# Altium PCB PCB_partes_proyecto.PcbDoc
Units mm, origin at the board's own origin, x right, y up, seen from the top; angles counter-clockwise.
Board outline 120 x 101.6 mm, 2 copper layers (Top Layer, Bottom Layer); 62 components, 64 nets, 259 pads, 54 vias.
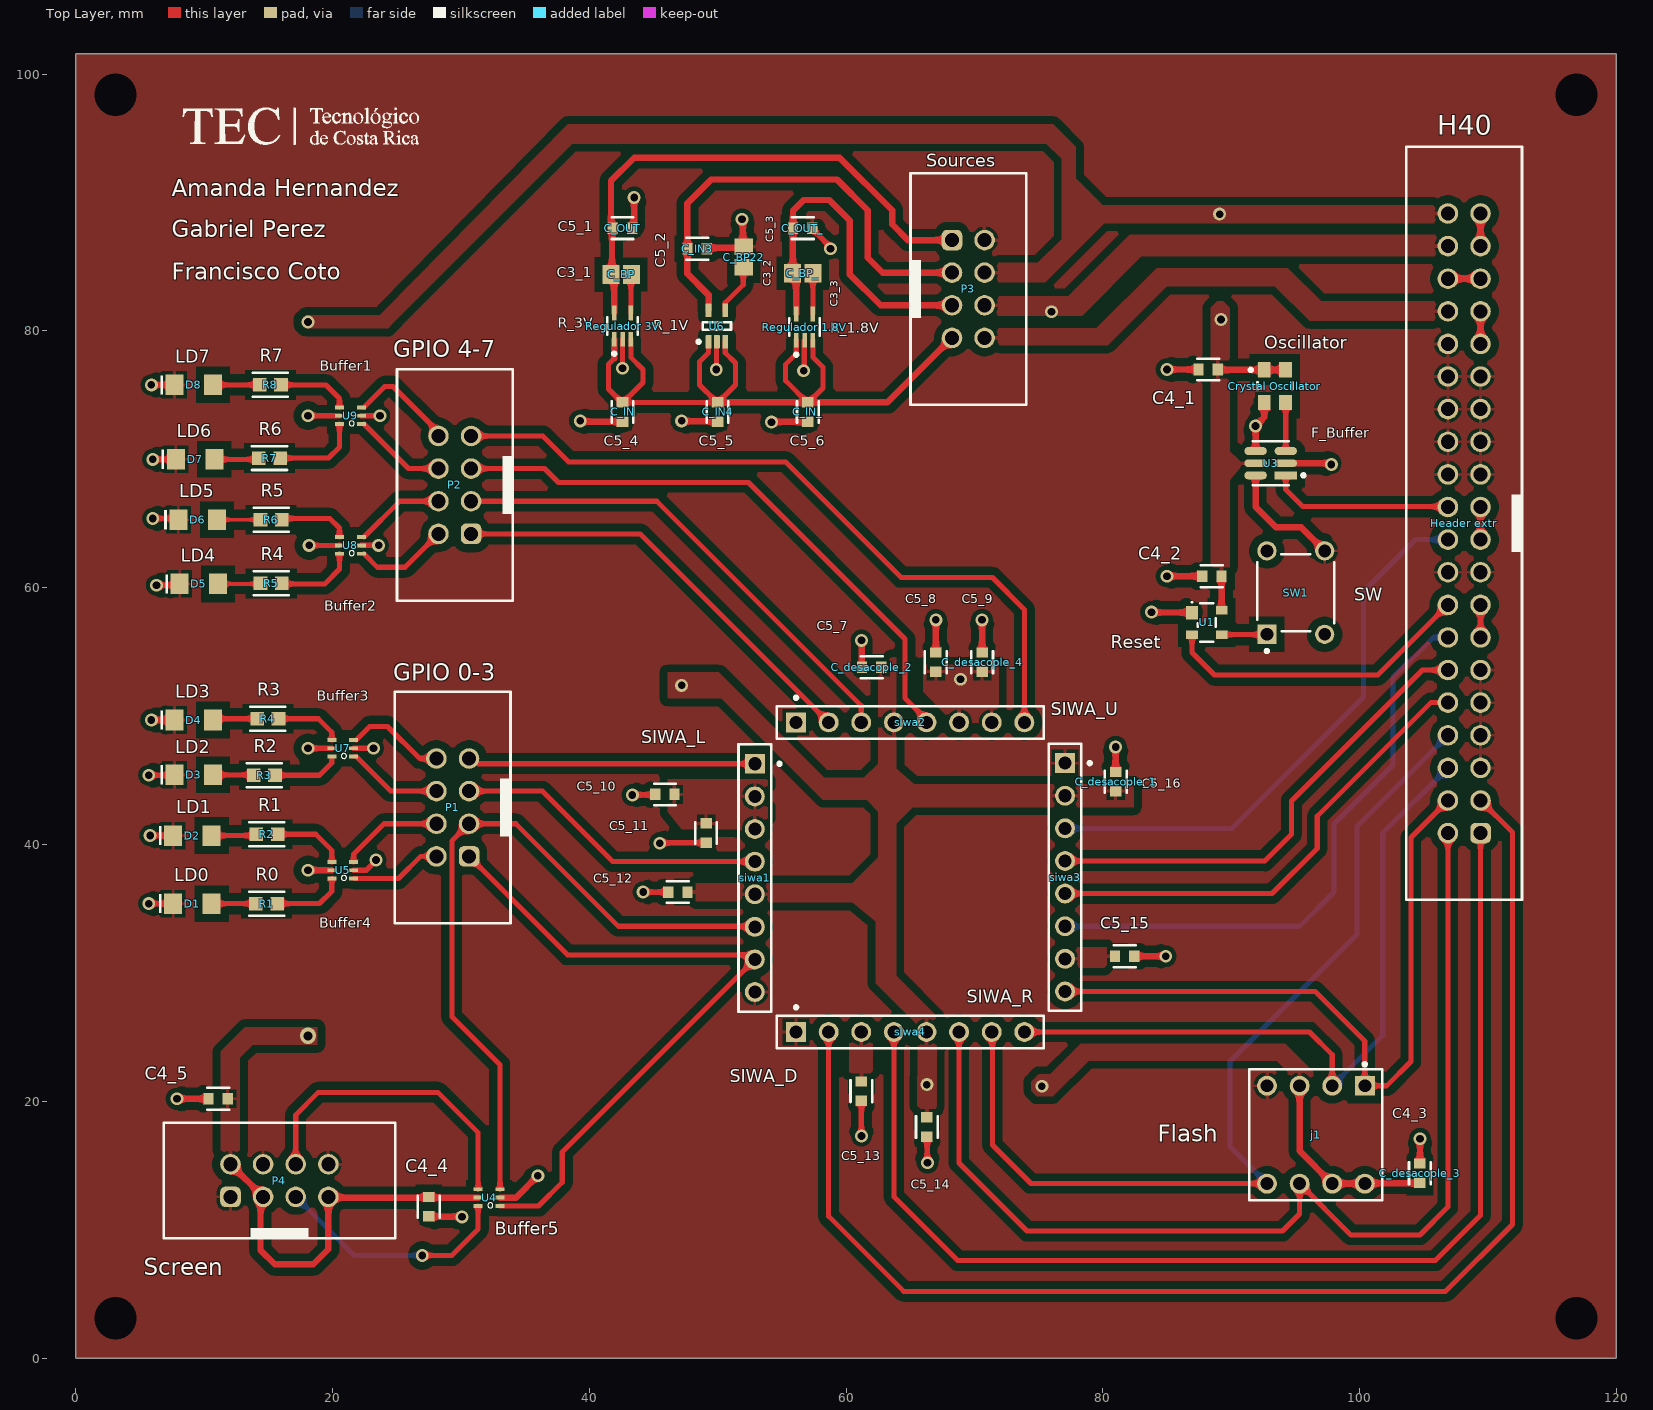
[diagram p0: Top Layer view]
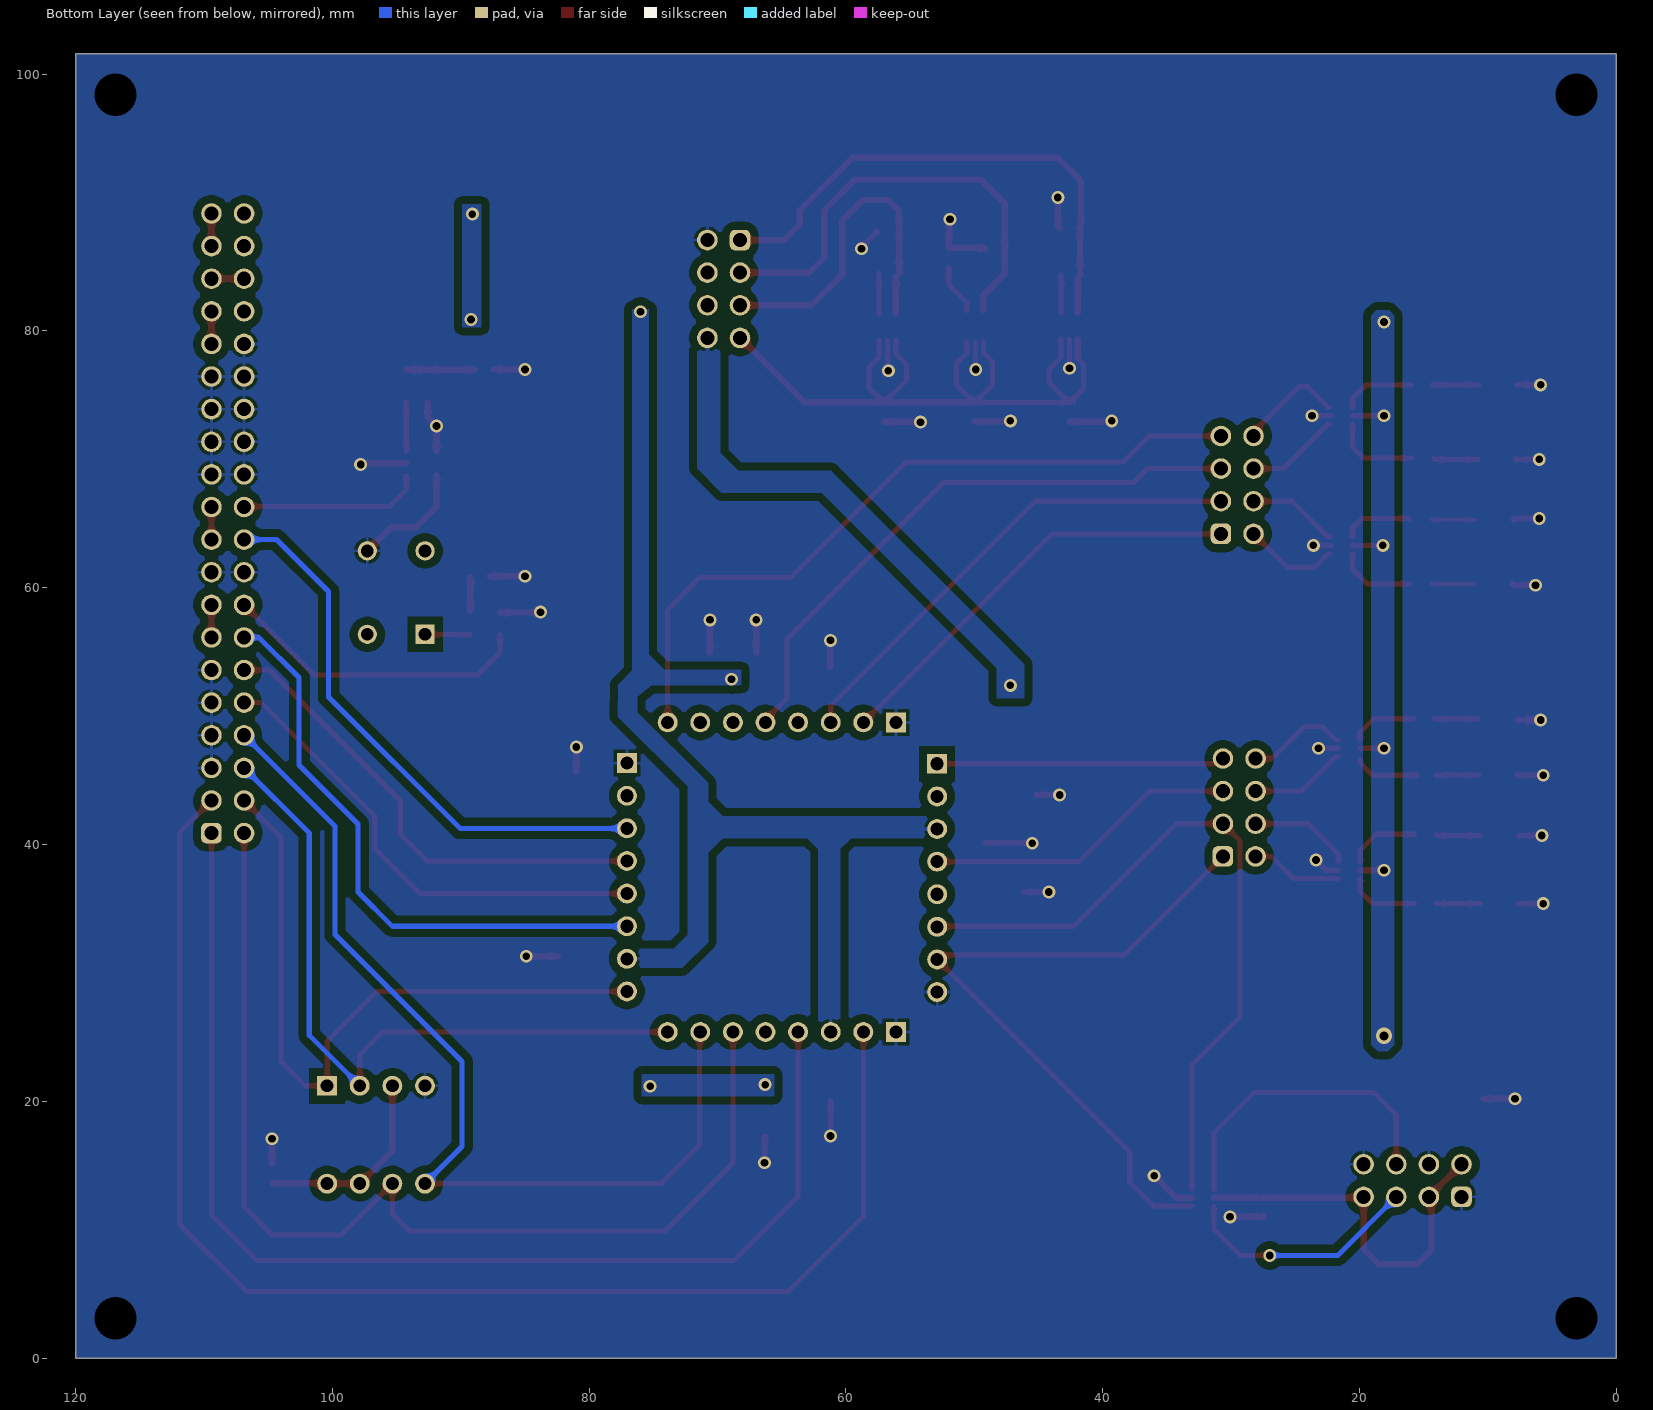
[diagram p1: Bottom Layer view, seen from below]
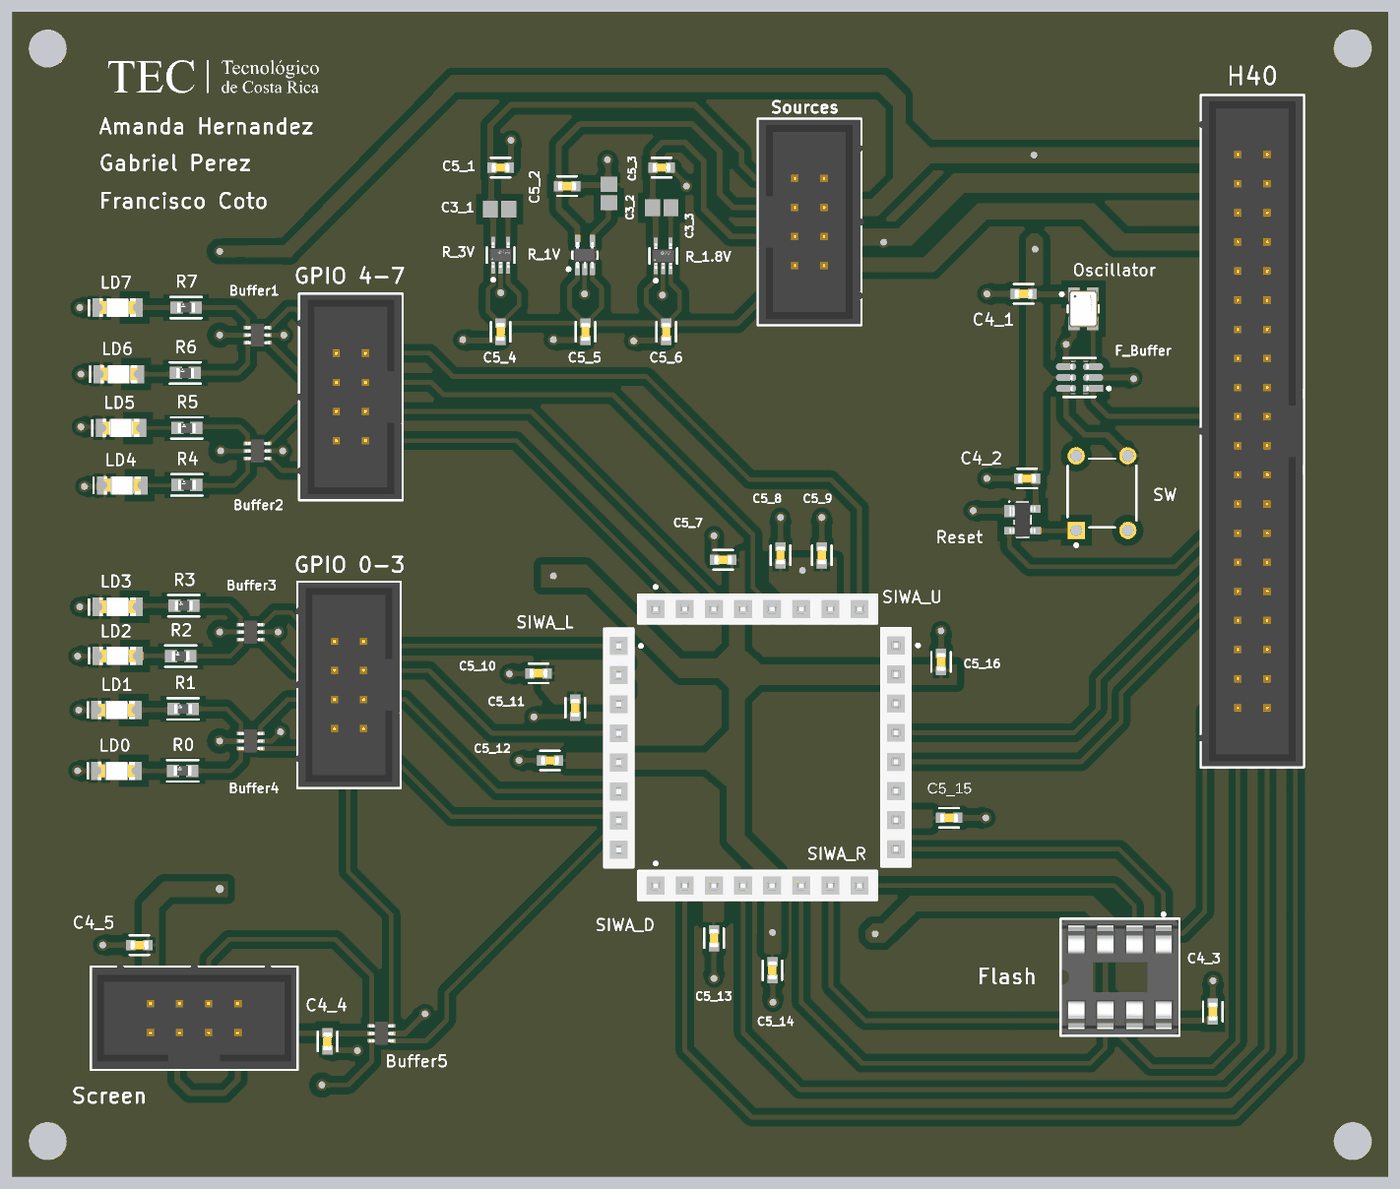
[diagram p2: 3D render of the assembled board from above, using the file's embedded part models]

## Layer stack, top to bottom
Top Solder: solder mask 0.0102, Solder Resist, Dk 3.5
Top Layer: signal copper 0.0356
Dielectric 1: dielectric 0.32, FR-4, Dk 4.8
Bottom Layer: signal copper 0.0356
Bottom Solder: solder mask 0.0102, Solder Resist, Dk 3.5

## Board outline
0,0 120,0 120,101.6 0,101.6

## Design rules (kind name [scope] priority, off if disabled: settings)
AssemblyTestPointUsage [All] p1: isadvanced=TRUE
AssemblyTestpoint [All] p1: isadvanced=TRUE testpointundercomponent=TRUE minsize=1.016 maxsize=2.54 preferedsize=1.524 minholesize=0 maxholesize=1.016 preferedholesize=0.813 testpointgrid=0.025 usegrid=TRUE gridtolerance=0 allowsidetop=TRUE allowsidebottom=TRUE
Clearance GND_Plane [(InNet('GND') AND IsRegion)] p1: isadvanced=TRUE gap=0.61 ignorepadtopadclearanceinfootprint=FALSE
Clearance Clearance_1 [OnMid vs OnMid] p2: gap=0.2 ignorepadtopadclearanceinfootprint=FALSE sourcerule=40 cellrowname=All cellrowtype=0 cellcolname=All cellcoltype=0 innerlayers=TRUE
Clearance Clearance_2 [(ExistsOnLayer('Top Layer') Or ExistsOnLayer('Bottom Layer')) vs (ExistsOnLayer('Top Layer') Or ExistsOnLayer('Bottom Layer'))] p3: gap=0.2 ignorepadtopadclearanceinfootprint=FALSE sourcerule=40 cellrowname=All cellrowtype=0 cellcolname=All cellcoltype=0 outerlayers=TRUE
Clearance [All] p4: gap=0.254 ignorepadtopadclearanceinfootprint=FALSE ismatrix=TRUE
ComponentClearance [All] p1: isadvanced=TRUE gap=0.254 collisioncheckmode=3 verticalgap=0.254 showdistances=FALSE
FabricationTestPointUsage [All] p1: isadvanced=TRUE valid=0 allowmultiple=FALSE
FabricationTestpoint [All] p1: isadvanced=TRUE side=3 testpointundercomponent=TRUE minsize=1.016 maxsize=2.54 preferedsize=1.524 minholesize=0 maxholesize=1.016 preferedholesize=0.813 testpointgrid=0.025 allowsidetop=TRUE allowsidebottom=TRUE usegrid=TRUE gridtolerance=0
FanoutControl Fanout_BGA [IsBGA] p1: isadvanced=TRUE bgadir=Out bgaviamode=Centered fanoutstyle=Auto fanoutdirection=Alternating viagrid=0.025 // Fanout_BGA (Default Rule)
FanoutControl Fanout_LCC [IsLCC] p2: isadvanced=TRUE bgadir=Out bgaviamode=Centered fanoutstyle=Auto fanoutdirection=Alternating viagrid=0.025 // Fanout_LCC (Default Rule)
FanoutControl Fanout_SOIC [IsSOIC] p3: isadvanced=TRUE bgadir=Out bgaviamode=Centered fanoutstyle=Auto fanoutdirection=Alternating viagrid=0.025 // Fanout_SOIC (Default Rule)
FanoutControl Fanout_Small [(CompPinCount < 5)] p4: isadvanced=TRUE bgadir=Out bgaviamode=Centered fanoutstyle=Auto fanoutdirection=OutThenIn viagrid=0.025 // Fanout_Small (Default Rule)
FanoutControl Fanout_Default [All] p5: isadvanced=TRUE bgadir=Out bgaviamode=Centered fanoutstyle=Auto fanoutdirection=Alternating viagrid=0.025 // Fanout_Default (Default Rule)
Height [All] p1: isadvanced=TRUE minheight=0 maxheight=25.4 prefheight=12.7
HoleSize [All] p1: isadvanced=TRUE absolutevalues=TRUE maxlimit=3.3 minlimit=0.025 maxpercent=80.000 minpercent=20.000
HoleToHoleClearance [All] p1: isadvanced=TRUE gap=0.254 allowstackedmicrovias=TRUE
LayerPairs [All] p1: isadvanced=TRUE enforce=TRUE
MinimumSolderMaskSliver [All] p1: isadvanced=TRUE minsoldermaskwidth=0.18
NetAntennae [All] p1: isadvanced=TRUE netantennaetolerance=0
PasteMaskExpansion [All] p1: isadvanced=TRUE expansion=0
PlaneClearance [All] p1: isadvanced=TRUE clearance=0.508
PlaneConnect [All] p1: isadvanced=TRUE planeconnectstyle=Relief reliefexpansion=0.508 reliefentries=4 reliefconductorwidth=0.254 reliefairgap=0.254
PolygonConnect [All] p1: connectstyle=Relief reliefconductorwidth=0.254 reliefentries=4 polygonreliefangle="90 Angle" airgapwidth=0.254
RoutingCorners [All] p1: isadvanced=TRUE cornerstyle=45-Degree minsetback=2.54 maxsetback=2.54
RoutingPriority [All] p1: isadvanced=TRUE routingpriority=0
RoutingVias [All] p1: holewidth=0.6 width=1 viastyle="Through Hole" minholewidth=0.6 minwidth=1 maxholewidth=0.6 maxwidth=1
ShortCircuit [All] p1: isadvanced=TRUE allowed=FALSE
SilkToSilkClearance [All] p1: isadvanced=TRUE silktosilkclearance=0.254
SilkToSolderMaskClearance [IsPad] p1: isadvanced=TRUE minsilkscreentomaskgap=0.19 clearancetoexposedcopper=TRUE
SolderMaskExpansion SolderMaskExpansion_Via [All] p1: isadvanced=TRUE expansion=0.102 istentingtop=TRUE useseparateexpansions=TRUE expansionbottom=0.102 istentingbottom=TRUE
SolderMaskExpansion [All] p2: isadvanced=TRUE expansion=0.102 istentingtop=FALSE
SupplyNets "Schematic Supply Nets" [InNet('GND')] p1: isadvanced=TRUE voltage=0.000
UnRoutedNet [All] p1: isadvanced=TRUE
UnpouredPolygon [All] p1: isadvanced=TRUE
Width "Schematic Width Constraint" [InNetClass('Power')] p1: maxlimit=0.6 minlimit=0.25 preferedwidth=0.5 minimp=50.000000 maximp=50.000000 favimp=50.000000
Width [All] p2: maxlimit=0.45 minlimit=0.2 preferedwidth=0.3 minimp=50.000000 maximp=50.000000 favimp=50.000000
4 further rules are at their usual default settings.

## Classes and differential pairs
net class Power: "Alimentación 1.8V" "Alimentación 1V" "Alimentación 3V" "Alimentación ext 1.8V" "Alimentación ext 1V" "Alimentación ext 3V" "Fuente 3.3V" GND "Salida de regulador de 1.8V" "Salida de regulador de 1V" "Salida de regulador de 3V"
component class partes_proyecto: C4_1 C4_2 C4_4 C4_5 C5_8 C5_10 C5_11 C5_12 C5_14 C5_15 C_BP22 C_desacople_1 C_desacople_2 C_desacople_3 C_desacople_4 C_IN C_IN3 C_IN4 "Crystal Oscillator" D1 D2 D3 D4 D5 D6 D7 D8 "Fanout Buffer" "Header extr" j1 P1 P2 P3 P4 R1 R2 R3 R4 R5 R6 R7 R8 R101 "Regulador 1.8V" "Regulador 3V" siwa1 siwa2 siwa4 SW1 U1 U3 U4 U5 U6 U7 U8 U9

## Components (designator, comment, footprint, x,y, rotation, side; value= is the part's Value field where it differs from the comment)
C4_1 "CC0603KRX7R7BB104" FP-CC0603-DA-MFG 88.2,77 r180 top value="100 nF" (schematic designator C_desacople_12)
C4_2 "CC0603KRX7R7BB104" FP-CC0603-DA-MFG 88.5,60.9 r0 top value="100 nF" (schematic designator C_desacople_13)
C4_4 "CC0603KRX7R7BB104" FP-CC0603-DA-MFG 27.5,11.8 r270 top value="100 nF" (schematic designator C_desacople_14)
C4_5 "CC0603KRX7R7BB104" FP-CC0603-DA-MFG 11.1,20.2 r0 top value="100 nF" (schematic designator C_desacople_15)
C5_8 "CC0603KRX7R7BB104" FP-CC0603-DA-MFG 67,54.2 r90 top value="100 nF" (schematic designator C_desacople_5)
C5_10 "CC0603KRX7R7BB104" FP-CC0603-DA-MFG 45.9,43.9 r0 top value="100 nF" (schematic designator C_desacople_10)
C5_11 "CC0603KRX7R7BB104" FP-CC0603-DA-MFG 49.1,40.9 r90 top value="100 nF" (schematic designator C_desacople_11)
C5_12 "CC0603KRX7R7BB104" FP-CC0603-DA-MFG 46.9,36.3 r180 top value="100 nF" (schematic designator C_desacople_9)
C5_13 "CC0603KRX7R7BB104" FP-CC0603-DA-MFG 61.2,20.8 r270 top value="100 nF" (schematic designator C_desacople_8)
C5_14 "CC0603KRX7R7BB104" FP-CC0603-DA-MFG 66.3,18 r270 top value="100 nF" (schematic designator C_desacople_7)
C5_15 "CC0603KRX7R7BB104" FP-CC0603-DA-MFG 81.7,31.3 r0 top value="100 nF" (schematic designator C_desacople_6)
C_BP "C3_1" CAPC2013X100X50NL20T25 42.5,84.4 r180 top
C_BP22 "C3_2" CAPC2013X100X50NL20T25 52.036,85.757 r270 top
C_BP_ "C3_3" CAPC2013X100X50NL20T25 56.632,84.501 r180 top
C_desacople_1 "C5_16" FP-CC0603-DA-MFG 81,44.9 r270 top value="100 nF"
C_desacople_2 "C5_7" FP-CC0603-DA-MFG 62,53.8 r180 top value="100 nF"
C_desacople_3 "C4_3" FP-CC0603-DA-MFG 104.7,14.4 r270 top value="100 nF"
C_desacople_4 "C5_9" FP-CC0603-DA-MFG 70.6,54.2 r90 top value="100 nF"
C_IN "C5_4" FP-CC0603-DA-MFG 42.594,73.689 r270 top value="100 nF"
C_IN3 "C5_2" FP-CC0603-DA-MFG 48.4,86.4 r0 top value="100 nF"
C_IN4 "C5_5" FP-CC0603-DA-MFG 49.995,73.689 r270 top value="100 nF"
C_IN_ "C5_6" FP-CC0603-DA-MFG 57.034,73.689 r270 top value="100 nF"
C_OUT "C5_1" FP-CC0603-DA-MFG 42.594,88.012 r0 top value="100 nF"
C_OUT_ "C5_3" FP-CC0603-DA-MFG 56.625,88.012 r0 top value="100 nF"
"Crystal Oscillator" "Oscillator" FP-ASE3-MFG 93.4,75.7 r270 top
D1 "LD0" WL-SMCW_1206_150120xx75000 9.1,35.4 r0 top locked
D2 "LD1" WL-SMCW_1206_150120xx75000 9.1,40.7 r0 top
D3 "LD2" WL-SMCW_1206_150120xx75000 9.208,45.426 r0 top
D4 "LD3" WL-SMCW_1206_150120xx75000 9.2,49.7 r0 top
D5 "LD4" WL-SMCW_1206_150120xx75000 9.6,60.3 r0 top
D6 "LD5" WL-SMCW_1206_150120xx75000 9.5,65.3 r0 top
D7 "LD6" WL-SMCW_1206_150120xx75000 9.3,70 r0 top
D8 "LD7" WL-SMCW_1206_150120xx75000 9.2,75.8 r0 top
"Header extr" "H40" 61204021621 108.151,65.02 r90 top
j1 "Flash" FP-1-2199298-2-MFG 96.6,17.4 r180 top
P1 "GPIO 0-3" 61200821621 29.37,42.89 r90 top
P2 "GPIO 4-7" 61200821621 29.53,68.01 r90 top
P3 "Sources" 61200821621 69.525,83.27 r270 top
P4 "Screen" 61200821621 15.872,13.83 r0 top
R1 "R0" FP-MCT0603-IPC_A 14.871,35.4 r180 top
R2 "R1" FP-MCT0603-IPC_A 14.9,40.8 r180 top
R3 "R2" FP-MCT0603-IPC_A 14.7,45.4 r180 top
R4 "R3" FP-MCT0603-IPC_A 14.971,49.8 r180 top
R5 "R4" FP-MCT0603-IPC_A 15.233,60.339 r180 top
R6 "R5" FP-MCT0603-IPC_A 15.229,65.3 r180 top
R7 "R6" FP-MCT0603-IPC_A 15.1,70.1 r180 top
R8 "R7" FP-MCT0603-IPC_A 15.171,75.8 r180 top
"Regulador 1.8V" "R_1.8V" FP-X5-1-MFG 56.771,80.303 r90 top
"Regulador 3V" "R_3V" FP-X5-1-MFG 42.594,80.381 r90 top
siwa1 "SIWA_L" SLIN-PPPC081LFBN-RC_V#1 52.9,37.4 r270 top
siwa2 "SIWA_U" SLIN-PPPC081LFBN-RC_V#1 65,49.515 r0 top
siwa3 "SIWA_R" SLIN-PPPC081LFBN-RC_V#2 77.065,37.45 r270 top
siwa4 "SIWA_D" SLIN-PPPC081LFBN-RC_V#1 65,25.4 r0 top
SW1 "SW" OMRON-B3F-1000-4_V 95.033,59.624 r90 top
U1 "Reset" APX812-29UG7 88.1,57.3 r0 top
U3 "F_Buffer" FP-SOT23-6LD-PL-1-IPC_A 93.075,69.7 r180 top
U4 "Buffer5" SOT363_INFINEON 32.2,12.5 r90 top
U5 "Buffer4" SOT363_INFINEON 20.8,38 r90 top
U6 "R_1V" DCK0005A_M 49.945,80.381 r90 top
U7 "Buffer3" SOT363_INFINEON 20.8,47.5 r90 top
U8 "Buffer2" SOT363_INFINEON 21.4,63.3 r90 top
U9 "Buffer1" SOT363_INFINEON 21.4,73.4 r90 top

## Footprints (in the part's own frame and the unit in brackets; to place one, negate y for a bottom-side part, rotate by r counter-clockwise, add the part's x,y. Pads: shape width x height; smd on the part's side, far side on the other; paste and mask are expansions set on the pad)
61200821621 [mm] "8 pins, straight, gold plating"
  rrect50% 1.6x1.6 hole 1.1 mask+0.01: 1(-3.81,-1.27)
  round 1.6 hole 1.1 mask+0.01: 2(-3.81,1.27) 3(-1.27,-1.27) 4(-1.27,1.27) 5(1.27,-1.27) 6(1.27,1.27) 7(3.81,-1.27) 8(3.81,1.27)
  silkscreen extent -9.01,-4.5 9.01,4.5, body extent -8.91,-4.42 8.91,4.75, height 9.13
61204021621 [mm] "40 pins, straight, gold plating"
  rrect50% 1.6x1.6 hole 1.1 mask+0.01: 1(-24.13,-1.27)
  round 1.6 hole 1.1 mask+0.01: 2(-24.13,1.27) 3(-21.59,-1.27) 4(-21.59,1.27) 5(-19.05,-1.27) 6(-19.05,1.27) 7(-16.51,-1.27) 8(-16.51,1.27) 9(-13.97,-1.27) 10(-13.97,1.27) 11(-11.43,-1.27) 12(-11.43,1.27) 13(-8.89,-1.27) 14(-8.89,1.27) 15(-6.35,-1.27) 16(-6.35,1.27) 17(-3.81,-1.27) 18(-3.81,1.27) 19(-1.27,-1.27) 20(-1.27,1.27) 21(1.27,-1.27) 22(1.27,1.27) 23(3.81,-1.27) 24(3.81,1.27) 25(6.35,-1.27) 26(6.35,1.27) 27(8.89,-1.27) 28(8.89,1.27) 29(11.43,-1.27) 30(11.43,1.27) 31(13.97,-1.27) 32(13.97,1.27) 33(16.51,-1.27) 34(16.51,1.27) 35(19.05,-1.27) 36(19.05,1.27) 37(21.59,-1.27) 38(21.59,1.27) 39(24.13,-1.27) 40(24.13,1.27)
  silkscreen extent -29.33,-4.5 29.33,4.5, body extent -29.23,-4.42 29.23,4.75, height 9.13
APX812-29UG7 [mm] "SOT143, 4-Leads, Body 2.90x2.38mm, Pitch 1.90mm, IPC Medium Density"
  rect 0.9x1.05 smd mask+0.01: 1(-1.15,0.75)
  rect 0.9x0.65 smd mask+0.01: 2(-1.15,-0.95) 3(1.15,-0.95) 4(1.15,0.95)
  silkscreen extent -1.2,-1.5 0.7,1.62, body extent -1.18,-1.5 1.18,1.5, height 1.1
CAPC2013X100X50NL20T25 [mm] "Chip Capacitor, 2-Leads, Body 2.00x1.25mm, IPC Medium Density"
  rect 1.3x1.45 smd mask+0.01: 1(-0.8,0) 2(0.8,0)
  body extent -1.1,-0.72 1.1,0.72, height 1
DCK0005A_M [mm] "SOT23, 5-Leads, Body 2.15x1.4mm, Pitch 0.65mm, IPC Low Density"
  rrect22% 1.05x0.45 smd mask+0.01: 1(-1.225,0.65) 2(-1.225,0) 3(-1.225,-0.65) 4(1.225,-0.65) 5(1.225,0.65)
  silkscreen extent -1.35,-1.1 0.3,1.55, body extent -1.14,-1 1.14,1, height 0.94
FP-1-2199298-2-MFG [mm]
  rect 1.55x1.55 hole 1 paste-2539.97 mask+0.01: 1(-3.81,-3.81)
  round 1.55 hole 1 paste-2539.97 mask+0.01: 2(-1.27,-3.81) 3(1.27,-3.81) 4(3.81,-3.81) 5(3.81,3.81) 6(1.27,3.81) 7(-1.27,3.81) 8(-3.81,3.81)
  silkscreen extent -5.18,-5.61 5.18,5.1, body extent -5.28,-5.2 5.28,5.2, height 0.25
FP-ASE3-MFG [mm]
  rect 1.2x1 smd paste+0 mask+0: 1(-1.27,-0.825) 2(1.27,-0.825) 3(1.27,0.825) 4(-1.27,0.825)
  silkscreen extent -1.39,-2 0.3,1.35, body extent -1.97,-1.45 1.97,1.45, height 0.25
FP-CC0603-DA-MFG [mm]
  rect 0.8x0.9 smd paste+0 mask+0: 1(-0.75,0) 2(0.75,0)
  silkscreen extent -0.85,-0.85 0.85,0.85, body extent -1.35,-0.75 1.35,0.75, height 0.25
FP-MCT0603-IPC_A [mm]
  rect 1.064x1.062 smd paste+0 mask+0: 1(-0.829,0) 2(0.829,0)
  silkscreen extent -1.36,-0.93 1.36,0.93, body extent -1.86,-1.03 1.86,1.03, height 0.25
FP-SOT23-6LD-PL-1-IPC_A [mm]
  rect 1.755x0.616 smd paste+0 mask+0: 1(-1.175,0.95)
  rrect100% 1.755x0.616 smd paste+0 mask+0: 2(-1.175,0) 3(-1.175,-0.95) 4(1.175,-0.95) 5(1.175,0) 6(1.175,0.95)
  silkscreen extent -2.68,-1.7 1.4,1.7, body extent -2.55,-1.95 2.55,1.95, height 0.25
FP-X5-1-MFG [mm]
  rect 1.15x0.35 smd paste+0 mask+0: 1(-1.025,0.65) 2(-1.025,0) 3(-1.025,-0.65) 4(1.025,-0.65) 5(1.025,0.65)
  silkscreen extent -2.27,-1.2 0.67,1.2, body extent -1.7,-1.2 1.7,1.2, height 0.25
OMRON-B3F-1000-4_V [mm] "TH, 4-Leads, Body 6x6mm"
  rect 1.5x1.5 hole 1 paste-2539.97 mask+0.01: 1(-3.25,2.25)
  round 1.5 hole 1 paste-2539.97 mask+0.01: 2(3.25,2.25) 3(-3.25,-2.25) 4(3.25,-2.25)
  silkscreen extent -4.67,-3 3,3, body extent -3,-3 3,3, height 4.5
SLIN-PPPC081LFBN-RC_V#1 [mm] "THD, 8-Leads, Body 20.82x2.54mm, Pitch 2.54mm"
  rect 1.55x1.55 hole 1.02 mask+0.01: 1(-8.89,0)
  round 1.55 hole 1.02 mask+0.01: 2(-6.35,0) 3(-3.81,0) 4(-1.27,0) 5(1.27,0) 6(3.81,0) 7(6.35,0) 8(8.89,0)
  silkscreen extent -10.41,-1.27 10.41,2.05, body extent -10.41,-1.27 10.41,1.27, height 8.5
SLIN-PPPC081LFBN-RC_V#2 [mm] "THD, 8-Leads, Body 20.82x2.54mm, Pitch 2.54mm"
  rect 1.55x1.55 hole 1.02 mask+0.01: 1(-8.89,0)
  round 1.55 hole 1.02 mask+0.01: 2(-6.35,0) 3(-3.81,0) 4(-1.27,0) 5(1.27,0) 6(3.81,0) 8(8.89,0)
  round 1.55 hole 1.02 mask+0.1: 7(6.35,0)
  silkscreen extent -10.41,-1.27 10.41,2.05, body extent -10.41,-1.27 10.41,1.27, height 8.5
SOT363_INFINEON [mm]
  rect 0.3x0.7 smd mask+0.01: 1(-0.65,-0.85) 2(0,-0.85) 3(0.65,-0.85) 4(0.65,0.85) 5(0,0.85) 6(-0.65,0.85)
  silkscreen extent -0.8,-0.3 -0.4,0.1, body extent -1,-1.05 1,1.05, height 1.1
WL-SMCW_1206_150120xx75000 [mm] "SMD Mono-color Chip LED, body 3.2x1.6mm"
  rect 1.4x1.6 smd mask+0.01: 1(-1.5,0) 2(1.5,0)
  silkscreen extent -2.6,-0.75 -2.4,0.75, body extent -1.6,-0.8 1.6,0.8, height 0.68

## Part data
C4_1 C4_2 C4_4 C4_5 C5_8 C5_10 C5_11 C5_12 C5_13 C5_14 C5_15: library part CMP-2000-05002-2, "CAP CER 0.1UF 16V X7R 0603", Capacitance="100 nF", Manufacturer=YAGEO, Package=CC0603-DA, Temperature="-55°C to +125°C", Temperature Characteristic=X7R, Temperature Coefficient=15%, Temperature Range High=+125°C, Temperature Range Low=-55°C, Tolerance=0.1, Voltage="16 V", Automotive=No, Category=Cap, ComponentLink2Description=Datasheet, ComponentLink2URL=http://www.yageo.com/documents/recent/UPY-GPHC_X7R_6.3V-to-50V_18.pdf, Device Class L1="Passive Components", Device Class L2=Capacitors, Device Class L3="Ceramic Capacitors", Digikey Description="CAP CER 0.1UF 16V X7R 0603", Footprint Url=http://www.yageo.com/exep/pages/download/literatures/UPY-C_GEN_24.pdf, Height=0.9mm, Lead Free=Yes, Manufacturer Part Number=CC0603KRX7R7BB104, Material=Ceramic, Mouser Description="Multilayer Ceramic Capacitor, CC Series, 0.1 - F, - 10%, X7R, 16 V, 0603 [1608 Metric]", Octopart=https://octopart.com/cc0603krx7r7bb104-yageo-192941, RoHS=TRUE, Voltage Rating="16 V"
C_BP C_BP22 C_BP_: library part CMP-2007-03708-1, Manufacturer=Kemet, Part Number=C0805F103K5RACTU
C_desacople_1 C_desacople_2 C_desacople_3 C_desacople_4 C_IN C_IN3 C_IN4 C_IN_ C_OUT C_OUT_: library part CMP-2000-05002-2, "CAP CER 0.1UF 16V X7R 0603", Capacitance="100 nF", Manufacturer=YAGEO, Manufacturer Part Number=CC0603KRX7R7BB104, Package=CC0603-DA, Temperature="-55°C to +125°C", Temperature Characteristic=X7R, Temperature Coefficient=15%, Temperature Range High=+125°C, Temperature Range Low=-55°C, Tolerance=0.1, Voltage="16 V", Automotive=No, Category=Cap, ComponentLink2Description=Datasheet, ComponentLink2URL=http://www.yageo.com/documents/recent/UPY-GPHC_X7R_6.3V-to-50V_18.pdf, Device Class L1="Passive Components", Device Class L2=Capacitors, Device Class L3="Ceramic Capacitors", Digikey Description="CAP CER 0.1UF 16V X7R 0603", Footprint Url=http://www.yageo.com/exep/pages/download/literatures/UPY-C_GEN_24.pdf, Height=0.9mm, Lead Free=Yes, Material=Ceramic, Mouser Description="Multilayer Ceramic Capacitor, CC Series, 0.1 - F, - 10%, X7R, 16 V, 0603 [1608 Metric]", Octopart=https://octopart.com/cc0603krx7r7bb104-yageo-192941, RoHS=TRUE, Voltage Rating="16 V"
"Crystal Oscillator": library part CMP-27762-010045-1, "XTAL OSC XO 20.0000MHZ CMOS SMD", Case/Package=SMD/SMT, Frequency=20MHz, Frequency Stability=30ppm, Load Capacitance=15pF, Max Operating Temperature=70°C, Max Supply Current=4mA, Max Supply Voltage=1.89V, Min Operating Temperature=-10°C, Min Supply Voltage=1.71V, Operating Supply Voltage=1.8V, Package Quantity=1000, Depth=2.5mm, Height=0.049inch, Lead Free="Lead Free", Length=3.2mm, Mount="Surface Mount", Number of Pins=4, Packaging="Tape and Reel", Radiation Hardening=No, Series=ASE3, Termination=SMD/SMT, Width=0.098inch
D1 D2 D3 D4 D5 D6 D7 D8: library part CMP-1426-00015-3, "WL-SMCW SMT Mono-Color Chip LED Waterclear", Case Code (Imperial)=1206, Case Code (Metric)=3216, Color=Blue, Forward Current=100mA, Forward Voltage=3.2V, Manufacturer Package Identifier=LED_1206, Max Operating Temperature=85°C, Max Reverse Voltage (DC)=5V, Min Operating Temperature=-40°C, Test Current=20mA, Case/Package=1206, Dominant Wavelength=470nm, Height=680µm, Length=3.2mm, Lens Style="Clear, Rectangular", Luminous Intensity=145mcd, Mount="Surface Mount", Packaging="Tape and Reel", Peak Wavelength=465nm, REACH SVHC=Unknown, RoHS=Compliant, Viewing Angle=140°, Wavelength=470nm, Width=1.6mm
"Header extr": library part CMP-1502-00015-3, Color=Black, Contact Resistance=20mΩ, Current Rating=3A, Insulation Resistance=1GΩ, Max Operating Temperature=105°C, Min Operating Temperature=-40°C, Operating Supply Voltage=250V, Connector Type="Male Pin", Contact Material=Copper, Contact Plating=Gold, Gender=Male, Height=9.25mm, Insulation Material=PBT, Lead Pitch=2.54mm, Length=58.46mm, Mount="Through Hole", NexarPartId=25903616, Number of Contacts=40, Number of Pins=40, Number of Positions=40, Number of Rows=2, Orientation=Vertical, Pitch=2.54mm, REACH SVHC=Unknown, RoHS=Compliant, Row Spacing=2.54mm, Termination=Solder, Voltage Rating=250V
j1: library part CMP-03370-000009-1, "CONN IC DIP SOCKET 8POS TIN", Color=Black, Contact Current Rating=1A, Contact Resistance=20mR, Flammability Rating="UL94 V-0", Insulation Resistance=1GR, Max Operating Temperature=105°C, Min Operating Temperature=-40°C, Package Quantity=60, Connector Type=Pin, Contact Finish - Mating=TIN, Contact Material=Bronze, Contact Plating=Tin, Contact Post Length=3inch, ELV=Compliant, Housing Material=PBT, Lead Free="Lead Free", Lead Pitch=2.54mm, Length=0.4inch, Mating Alignment="Yes (With)", Mount="Through Hole", Number of Contacts=8, Number of Positions=8, Number of Rows=2, Orientation=Straight, Packaging=Rail/Tube, Pitch=2.54mm, Radiation Hardening=No, RoHS Compliant=Yes, Row Spacing=0.3inch, Series="Diplomate DL", Termination="Through Hole"
P1 P2 P3 P4: library part CMP-1502-00006-2, Color=Black, Contact Resistance=20mΩ, Current Rating=3A, Insulation Resistance=1GΩ, Max Operating Temperature=105°C, Min Operating Temperature=-40°C, Operating Supply Voltage=250V, Connector Type="Male Pin", Contact Material=Copper, Contact Plating=Gold, Gender=Male, Insulation Material=PBT, Lead Pitch=2.54mm, Length=17.82mm, Mount="Through Hole", NexarPartId=32855460, Number of Contacts=8, Number of Pins=8, Number of Positions=8, Number of Rows=2, Orientation=Vertical, Pitch=2.54mm, REACH SVHC=Unknown, RoHS=Compliant, Row Spacing=2.54mm, Termination=Solder
R1 R2 R3 R4 R5 R6 R7 R8: library part CMP-02407-011165-1, "RES SMD 100 OHM 1% 1/8W 0603", Case Code (Imperial)=0603, Case Code (Metric)=1608, Max Operating Temperature=155°C, Max Power Dissipation=125mW, Min Operating Temperature=-55°C, Package Quantity=1000, Resistance=20kR, Resistor Type="Thin Film", Temperature Coefficient=25ppm/°C, Tolerance=0.1%, Voltage Rating=75V, Case/Package=0603, Construction=Rectangular, Depth=0.85mm, Features="Automotive AEC-Q200", Height=0.022inch, Length=1.55mm, Military Standard=Not, Number of Terminations=2, Packaging="Tape and Reel", Power Rating=125mW, Series="MCT 0603 - Precision", Termination=SMD/SMT, Weight=6.7E-05oz, Width=0.033inch
"Regulador 1.8V": library part CMP-0246-00401-2, "IC REG LINEAR 1.8V 120MA SC70-5", Case/Package=SC, Input Bias Current=40uA, Max Input Voltage=6V, Max Operating Temperature=85°C, Max Output Current=120mA, Max Power Dissipation=247mW, Min Current Limit=130mA, Min Input Voltage=2V, Min Operating Temperature=-40°C, Nominal Output Voltage=1.8V, Package Quantity=2500, Power Supply Rejection Ratio (PSRR)=54dB, Quiescent Current=90uA, Reference Voltage=1.225V, Accuracy=2%, Lead Free="Lead Free", Mount="Surface Mount", Number of Outputs=1, Number of Pins=5, Number of Regulators=1, Output Configuration=Positive, Output Current=120mA, Output Type=Fixed, Output Voltage=1.8V, Packaging="Tape and Reel", Polarity=Positive, RoHS Compliant=Yes, Series=-
"Regulador 3V": library part CMP-0246-00520-2, "IC REG LINEAR 3V 120MA SC70-5", Case/Package=SC, Dropout Voltage=120mV, Input Bias Current=40uA, Max Input Voltage=6V, Max Operating Temperature=85°C, Max Output Current=120mA, Max Power Dissipation=247mW, Min Current Limit=130mA, Min Input Voltage=2V, Min Operating Temperature=-40°C, Nominal Output Voltage=3V, Package Quantity=2500, Power Supply Rejection Ratio (PSRR)=54dB, Quiescent Current=90uA, Reference Voltage=1.225V, Accuracy=2%, Lead Free="Lead Free", Mount="Surface Mount", Number of Outputs=1, Number of Pins=5, Number of Regulators=1, Output Configuration=Positive, Output Current=120mA, Output Type=Fixed, Output Voltage=3V, Packaging="Tape and Reel", Polarity=Positive, Radiation Hardening=No, RoHS Compliant=Yes, Series=-
siwa1 siwa2 siwa3 siwa4: library part CMP-1770-00002-1, "Female Header, Pitch 2.54 mm, 1 x 8 Position, Height 8.5 mm, Tail Length 3.2 mm, -40 to 105 degC, RoHS, Bulk", Case\Package=TO-252-3, Input Capacitance="350 pF", Max Operating Temperature="150 degC", Max Power Dissipation="2.5 W", Min Operating Temperature="-55 degC", Package Quantity=2500, ComponentLink1Description=Datasheet, ComponentLink1URL=http://sullinscorp.com/catalogs/101_PAGE114-115_.100_FEMALE_HDR.pdf, DatasheetVersion=Jan-15, Elements=1, Height="2.39 mm", Length="6.73 mm", Mount="Surface Mount", PackageDescription="Female Header, Pitch 2.54 mm, 1 x 8 Position, Height 8.5 mm, Tail Length 3.2 mm", PackageReference=PPPC081LFBN-RC, Packaging="Tape and Reel", Pins=3, Radiation Hardening=No, Rds On Max="115 mohm", REACH SVHC="No SVHC", RoHSCompliant=true, Typical Rise Time="90 ns", Width="6.22 mm"
SW1: library part CMP-1677-00002-1, "Tactile Switch, SPST-NO, 0.05 A, 5 to 24 V, -25 to 70 degC, 4-Pin THD, RoHS, Bulk", Capacitance="-45 f", Current Rating="1.5 A", Max Operating Temperature="70 degC", Min Operating Temperature="-40 degC", Package Quantity=1080, Voltage Rating="150 V", ComponentLink1Description="Manufacturer URL", ComponentLink1URL=http://www.omron.com/, ComponentLink2Description=Datasheet, ComponentLink2URL=http://www.omron.com/ecb/products/pdf/en-b3f.pdf, Contact Material=Brass, Contact Plating=Gold, DatasheetVersion=Jan-15, Gender=Female, Height="14.99 mm", Lead Pitch="1.27 mm", Length="18.34 mm", Mount="Through Hole", PackageDescription="4-Pin Through Hole Device, Body 6 x 6 mm", PackageReference=B3F-1000, Packaging=Tray, Pins=8, Radiation Hardening=No, RoHSCompliant=true, Shielding=Shielded, Width="25.4 mm"
U1: library part APX812-29UG7, "4-Pin Microprocessor Supervisor With Manual Reset. SOT143."
U3: library part CMP-06262-000018-1, "IC CLK BUFFER 1:3 150MHZ 6SOT23", Case/Package=SOT-23-6, Max Frequency=150MHz, Max Operating Temperature=85°C, Min Operating Temperature=-40°C, Package Quantity=3000, Input=LVCMOS, Lead Free="Lead Free", Mount="Surface Mount", Number of Circuits=1, Packaging="Cut Tape", RoHS Compliant=Yes, Series=-
U4 U5 U7 U8 U9: library part 74LVC2G17GW,125
U6: library part CMP-0394-00843-2, "Single Output High PSRR LDO, 150 mA, Fixed 1 V Output, 2.5 to 6.5 V Input, with Low IQ, 5-pin SC70 (DCK), -40 to 85 degC, Green (RoHS & no Sb/Br)", Manufacturer="Texas Instruments", PartNumber=TPS71710DCKT, Accuracy(%)=3, Code_JEDEC=MO-203, ComponentLink1Description="Manufacturer URL", ComponentLink1URL=http://www.ti.com/, ComponentLink2Description=Datasheet, ComponentLink2URL=http://www.ti.com/general/docs/lit/getliterature.tsp?genericPartNumber=TPS71710&fileType=pdf, ComponentLink3Description="Package Specification", ComponentLink3URL=http://www.ti.com/litv/pdf/mpds025f, DatasheetVersion=SBVS068G, Eco-Plan="Green (RoHS & no Sb/Br)", Fixed Output Options(V)=1, Iout(Max)(A)=0.15, Iq(Typ)(mA)=0.05, Mounting Technology="Surface Mount", PackageDescription="5-Pin Plastic Small-Outline, Body 2 x 1.25 mm, Pitch 0.65 mm", PackageReference=DCK0005A, PackageVersion=4093553-3/G, SubFamily="Single Channel LDO", Vdo(Typ)(mV)=170, Vin(Max)(V)=6.5, Vin(Min)(V)=2.5, Vout Adj(Max)(V)=1, Vout Adj(Min)(V)=1

## Free pads (board coordinates)
  round 3 hole 3.3 mask+0.102: 3(3.1,98.4) 4(3.1,3.1) 5(116.9,98.4) 6(116.9,3.1)

## Via types
v1: diameter 1, hole 0.6, Top Layer to Bottom Layer, tented both sides, 53 vias
v2: diameter 1.27, hole 0.711, Top Layer to Bottom Layer, tented both sides, 1 vias

## Nets (pads, with @x,y where several pads share a name; then routed paths per layer and width w, separated by ;. In a path a pad name is that pad's centre, name@x,y a point inside that pad or via, vN(x,y) a via of type N, cw(c..) or ccw(c..) an arc to the next point about the centre after c; other vN are vias at no path point)
"Alimentación 1.8V": "Header extr.34" C5_12.1 C5_14.1 C_desacople_1.2 C_desacople_2.1 C_desacople_3.2 j1.3 j1.7 j1.8 P3.8 siwa1.5 siwa2.4 siwa3.2 siwa4.5 | length 15.5
  Top Layer w0.5: j1.3 95.33,16.13 j1.7 j1.8 100.44,13.62 C_desacople_3.2@104.67,13.62
  other v1: 75.253,21.173 66.3,21.3 47.2,52.4
"Alimentación 1V": "Header extr.38" C5_8.1 C5_10.2 C5_11.2 C5_13.1 C5_15.1 C_desacople_4.1 P3.6 siwa1.2 siwa1.3 siwa2.6 siwa2.7 siwa3.7 siwa4.3 | length 0
  Top Layer w0.5: v1@68.89,52.9 v1(68.917,52.873)
  other v1: 76,81.5
"Alimentación 3V": "Crystal Oscillator.1" "Crystal Oscillator.4" "Header extr.40" C4_1.1 C4_2.2 C4_4.1 C4_5.2 P3.4 P4.2 P4.3 P4.7 U1.4 U3.5 U4.5 U5.5 U7.5 U8.5 U9.5 | length 46.1
  Top Layer w0.4: v1(18.1,73.4) U9.5 ; v1(18.187,63.3) U8.5@20.55,63.3
  Top Layer w0.43: v1(18.1,47.5) U7.5
  Top Layer w0.5: P4.2 P4.3 ; P4.3@14.4,12.358 14.4,8.4 15.5,7.3 18.5,7.3 19.682,8.482 P4.7 19.737,12.505 C4_4.1@27.445,12.505 ; v1(18.1,38) U5.5 ; C4_4.1 27.55,12.5 U4.5 ; C4_1.1@88.95,76.97 92.575,76.97 94.225,76.97 ; U1.4 C4_2.2@89.25,60.8
  Bottom Layer w0.5: v1(18.1,47.5) v1@18.144,47.544 ; v1(18.1,73.4) v1@18.144,73.356 ; v1@18.144,63.257 v1(18.187,63.3) v1@18.144,63.344
  other v1: 18.1,80.7 89.2,80.9 89.1,89.1
  other v2: 18.1,25.1
"Alimentación ext 1.8V": "Header extr.31" "Header extr.33" | length 2.5
  Top Layer w0.5: 109.421,78.99 109.421,81.53
"Alimentación ext 1V": "Header extr.35" "Header extr.36" | length 2.5
  Top Layer w0.5: 106.881,84.07 109.421,84.07
"Alimentación ext 3V": "Header extr.37" "Header extr.39" | length 2.5
  Top Layer w0.5: 109.421,86.61 109.421,89.15
CLK0: "Header extr.22" U3.1 | length 14.3
  Top Layer w0.25: 106.851,66.32 106.881,66.29
  Top Layer w0.4: U3.1 94.251,67.649 95.58,66.32 106.851,66.32
"CLK de SIWA": "Header extr.20" siwa3.3 | length 43.9
  Bottom Layer w0.4: siwa3.3@77.065,41.252 90.052,41.252 100.3,51.5 100.3,59.7 104.35,63.75 106.881,63.75
"CLk ext": "Header extr.19" "Header extr.21" | length 2.5
  Top Layer w0.4: 109.421,63.75 109.421,66.29
"Fuente 3.3V": "Regulador 1.8V.1" "Regulador 1.8V.3" "Regulador 3V.1" "Regulador 3V.3" C_IN4.1 C_IN.1 C_IN_.1 P3.7 U6.1 U6.3 | length 61
  Top Layer w0.4: 41.944,77.858 41.5,77.414 41.5,75.483 C_IN.1@42.369,74.614 ; C_IN.1 C_IN4.1 ; C_IN.1@42.819,74.614 44.2,75.996 44.2,77 43.244,77.956 43.244,79.356 ; U6.1 49.295,78.295 48.6,77.6 48.6,75.784 C_IN4.1@49.77,74.614 ; C_IN4.1@50.22,74.614 51.4,75.794 51.4,77.5 50.595,78.305 U6.3 ; 56.121,79.278 56.121,78.221 55.3,77.4 55.3,76.123 56.984,74.439 C_IN_.1 ; C_IN_.1@57.084,74.439 58.2,75.556 58.2,77.174 57.421,77.953 57.421,79.278
  Top Layer w0.5: 41.944,77.858 41.944,79.356 ; C_IN4.1 C_IN_.1 63.235,74.439 P3.7
GND: "Crystal Oscillator.2" "Header extr.5" "Header extr.7" "Header extr.9" "Header extr.11" "Header extr.17" "Header extr.18" "Header extr.23" "Header extr.24" "Header extr.25" "Header extr.26" "Header extr.27" "Header extr.28" "Header extr.29" "Header extr.30" "Header extr.32" "Regulador 1.8V.2" "Regulador 3V.2" C4_1.2 C4_2.1 C4_4.2 C4_5.1 C5_8.2 C5_10.1 C5_11.1 C5_12.2 C5_13.2 C5_14.2 C5_15.2 C_BP22.1 C_desacople_1.1 C_desacople_2.2 C_desacople_3.1 C_desacople_4.2 C_IN3.2 C_IN4.2 C_IN.2 C_IN_.2 C_OUT.2 C_OUT_.2 D1.1 D2.1 D3.1 D4.1 D5.1 D6.1 D7.1 D8.1 j1.4 P3.2 P4.1 P4.4 P4.8 pad.3 pad.4 pad.5 pad.6 siwa1.8 siwa2.1 siwa3.1 siwa4.1 SW1.4 U1.1 U3.2 U3.4 U3.6 U4.2 U5.2 U6.2 U7.2 U8.2 U9.2 | length 106.6
  Top Layer w0.25: 42.594,79.356 42.597,79.353 ; v1@42.597,77.103 v1(42.6,77.1) ; v1(49.9,77) v1@49.922,77.022 ; U6.2@49.922,79.134 U6.2 ; v1(56.7,76.9) v1@56.735,76.935 ; U1.1@86.9,58.1 U1.1 ; v1@97.7,69.7 v1(97.8,69.6) ; v1@104.7,17.078 v1(104.712,17.091)
  Top Layer w0.3: v1@56.735,76.935 v1@56.746,76.946 ; 56.746,79.253 56.771,79.278
  Top Layer w0.4: v1(5.7,35.4) D1.1 ; v1(5.7,45.4) D3.1@7.682,45.4 ; v1(5.8,40.7) D2.1 ; v1(6,65.4) D6.1@7.9,65.4 ; v1(6,70) D7.1 ; v1(6.3,60.2) D5.1@8,60.2 ; U9.2 v1(23.7,73.4) ; v1@42.597,77.103 42.597,79.353 ; v1@49.922,77.022 U6.2@49.922,79.134 ; v1@56.746,76.946 56.746,79.253 ; C_OUT_.2@57.55,87.787 58.8,86.537 v1(58.8,86.4)
  Top Layer w0.43: v1(5.9,75.8) D8.1 ; D3.1@7.682,45.4 D3.1 ; U5.2 22.645,38 23.4,38.755 v1(23.4,38.8) ; U7.2 v1(23.2,47.5) ; U8.2 v1(23.6,63.3) ; v1@43.383,43.877 C5_10.1@45.127,43.877 ; v1(44.2,36.3) C5_12.2 ; v1@45.525,40.125 C5_11.1@49.075,40.125 ; v1(61.2,17.3) C5_13.2 ; v1@66.325,15.242 C5_14.2@66.325,17.225
  Top Layer w0.5: v1(5.9,49.7) D4.1 ; v1(7.9,20.2) C4_5.1 ; D6.1@7.9,65.4 D6.1 ; D5.1@8,60.2 D5.1 ; C4_4.2 27.525,11.025 30.075,11.025 v1(30.1,11) ; U4.2 34.3,12.5 v1(36,14.2) ; v1(39.3,73) 39.361,72.939 C_IN.2 ; C_OUT.2 43.494,88.162 43.494,89.144 43.5,89.15 v1(43.5,90.4) v1@43.509,90.391 ; v1(43.36,43.854) v1@43.383,43.877 ; C5_10.1@45.127,43.877 C5_10.1 ; v1(45.5,40.1) v1@45.525,40.125 ; v1(47.2,73) 47.23,72.97 49.964,72.97 C_IN4.2 ; C5_11.1@49.075,40.125 C5_11.1 ; C_IN3.2 49.229,86.479 51.957,86.479 C_BP22.1 51.968,86.625 51.968,88.632 v1(51.9,88.7) ; v1(54.2,72.9) 54.22,72.92 57.014,72.92 C_IN_.2 ; v1(61.2,55.9) 61.225,55.875 61.225,53.825 C_desacople_2.2 ; C5_14.2 C5_14.2@66.325,17.225 ; v1@66.325,15.242 v1(66.35,15.217) ; C5_8.2 v1(67,57.5) ; C_desacople_4.2 v1(70.6,57.5) ; C_desacople_1.1 v1(81,47.6) ; C5_15.2 v1(84.9,31.3) ; v1(83.8,58.1) 83.825,58.075 86.875,58.075 U1.1@86.9,58.1 ; v1(85,60.9) C4_2.1 ; v1(85,77) C4_1.2 ; U3.6 91.9,66.3 93.5,64.7 95.456,64.7 SW1.4 ; U3.4 v1(91.9,72.6) 92.575,73.275 92.575,74.43 ; U3.2 v1@97.7,69.7 ; C_desacople_3.1 104.706,15.156 104.706,17.085 v1(104.712,17.091)
GPIO0: P1.1 siwa1.7 U4.1 | length 54.8
  Top Layer w0.3: siwa1.7@52.562,31.05 siwa1.7
  Top Layer w0.4: P1.1 38.32,31.4 52.212,31.4 siwa1.7@52.562,31.05 ; U4.1 36.05,11.85 37.9,13.7 37.9,16.05 siwa1.7
GPIO0_B_LED: R1.1 U5.6 | length 5.6
  Top Layer w0.4: R1.1 19,35.4 19.95,36.35 U5.6
GPIO0_B_Pantalla: P4.5 U4.6 | length 18.7
  Top Layer w0.4: v1(27,8) 29.3,8 31.35,10.05 U4.6
  Bottom Layer w0.4: P4.5 21.702,8 v1(27,8)
GPIO0_Salida_Header_1: P1.2 U5.1 | length 7.2
  Top Layer w0.3: 26.88,39.08 P1.2
  Top Layer w0.4: U5.1 25.15,37.35 26.88,39.08
GPIO1: P1.3 siwa1.6 U4.3 | length 56.1
  Top Layer w0.4: U4.3 33.05,22.85 29.3,26.6 29.3,40.28 P1.3 34.28,41.62 42.268,33.632 siwa1.6@52.9,33.632
GPIO1_B_LED: R2.1 U5.4 | length 5.6
  Top Layer w0.4: R2.1 18.7,40.8 19.95,39.55 U5.4
GPIO1_Salida_Header_1: P1.4 U5.3 | length 8
  Top Layer w0.4: U5.3 21.65,39.25 24.02,41.62 P1.4
GPIO1B_Pantalla: P4.6 U4.4 | length 24.5
  Top Layer w0.4: P4.6 17.142,18.942 18.9,20.7 28.2,20.7 31.35,17.55 U4.4
GPIO2: P1.5 siwa1.4 | length 24.5
  Top Layer w0.4: P1.5 36.34,44.16 41.83,38.67 siwa1.4
GPIO2_B_LED: R3.1 U7.6 | length 5.1
  Top Layer w0.4: R3.1 19,45.4 19.95,46.35 19.95,46.6
GPIO2_Salida_Header_1: P1.6 U7.1 | length 7.6
  Top Layer w0.3: U7.1 U7.1@21.85,46.85
  Top Layer w0.4: U7.1@21.85,46.85 24.54,44.16 P1.6
GPIO3: P1.7 siwa1.1 | length 22.4
  Top Layer w0.3: P1.7 P1.7@30.992,46.7
  Top Layer w0.4: P1.7@30.992,46.7 31.402,46.29 siwa1.1
GPIO3_B_LED: R4.1 U7.4 | length 5.2
  Top Layer w0.4: R4.1 18.9,49.8 19.95,48.75 U7.4
GPIO3_Salida_Header_1: P1.8 U7.3 | length 7.9
  Top Layer w0.3: U7.3 U7.3@21.85,48.15
  Top Layer w0.4: U7.3@21.85,48.15 22.9,49.2 24.3,49.2 26.8,46.7 P1.8
GPIO4: P2.1 siwa2.2 | length 33.9
  Top Layer w0.4: P2.1 43.965,64.2 siwa2.2
GPIO4_B_LED: R5.1 U8.6 | length 6.2
  Top Layer w0.3: R5.1 R5.1@16.102,60.3
  Top Layer w0.4: R5.1@16.102,60.3 19.4,60.3 20.55,61.45 U8.6
GPIO4_Salida_Header2: P2.2 U8.1 | length 7.5
  Top Layer w0.3: U8.1 U8.1@22.45,62.65
  Top Layer w0.4: U8.1@22.45,62.65 23.5,61.6 25.66,61.6 P2.2
GPIO5: P2.3 siwa2.3 | length 38.3
  Top Layer w0.4: P2.3 45.26,66.74 61.19,50.81 siwa2.3
GPIO5_B_LED: R6.1 U8.4 | length 5.5
  Top Layer w0.3: R6.1 R6.1@16.159,65.4
  Top Layer w0.4: R6.1@16.159,65.4 19.8,65.4 20.55,64.65 U8.4
GPIO5_Salida_Header2: P2.4 U8.3 | length 7.2
  Top Layer w0.3: U8.3 U8.3@22.45,63.95
  Top Layer w0.4: U8.3@22.45,63.95 25.24,66.74 P2.4
GPIO6: P2.5 siwa2.5 | length 46.3
  Top Layer w0.4: P2.5 36.52,69.28 37.6,68.2 52.4,68.2 64.6,56 64.6,51.4 siwa2.5@66.28,49.72
GPIO6_B_LED: R7.1 U9.6 | length 6.8
  Top Layer w0.4: R7.1 19.7,70.1 20.55,70.95 U9.6
GPIO6_Salida_Header2: P2.6 U9.1 | length 7.4
  Top Layer w0.3: U9.1 U9.1@22.45,72.75
  Top Layer w0.4: U9.1@22.45,72.75 25.92,69.28 P2.6
GPIO7: P2.7 siwa2.8 | length 57.5
  Top Layer w0.4: P2.7 36.38,71.82 38.4,69.8 55.3,69.8 64.3,60.8 71.4,60.8 73.89,58.31 siwa2.8
GPIO7_B_LED: R8.1 U9.4 | length 5.7
  Top Layer w0.4: R8.1 19.5,75.8 20.55,74.75 U9.4
GPIO7_Salida_Header2: P2.8 U9.3 | length 8.5
  Top Layer w0.3: U9.3 U9.3@22.45,74.05 ; P2.8 P2.8@28.26,72.14
  Top Layer w0.4: U9.3@22.45,74.05 24.076,75.676 24.724,75.676 P2.8@28.26,72.14
MAIP: "Header extr.10" siwa3.5 | length 37.4
  Top Layer w0.4: siwa3.5 93.18,36.18 96.7,39.7 96.7,42.2 105.55,51.05 106.881,51.05
MISO: "Header extr.6" j1.2 siwa4.8 | length 55.6
  Top Layer w0.4: siwa4.8 96.1,25.4 97.87,23.63 j1.2
  Bottom Layer w0.4: j1.2 101.8,25.14 101.8,40.889 106.881,45.97
MOSI: "Header extr.8" j1.5 siwa4.7 | length 74.6
  Top Layer w0.25: j1.5@92.78,13.6 j1.5
  Top Layer w0.4: siwa4.7@71.4,25.4 71.4,16.6 74.4,13.6 j1.5@92.78,13.6
  Bottom Layer w0.4: j1.5 89.9,16.48 89.9,23.1 99.8,33 99.8,41.429 106.881,48.51
NetC_BP22_2: C_BP22.2 U6.4 | length 3.9
  Top Layer w0.3: U6.4 U6.4@50.6,81.611
  Top Layer w0.4: U6.4@50.6,81.611 50.6,82.2 52,83.6 C_BP22.2@52,84.922
NetC_BP_1: "Regulador 3V.4" C_BP.1 | length 2.9
  Top Layer w0.4: 43.244,81.406 C_BP.1@43.244,84.344
NetC_BP__1: "Regulador 1.8V.4" C_BP_.1 | length 3.2
  Top Layer w0.25: C_BP_.1@57.421,84.49 C_BP_.1
  Top Layer w0.4: 57.421,81.328 C_BP_.1@57.421,84.49
NetD1_2: D1.2 R1.2 | length 3.4
  Top Layer w0.4: D1.2 R1.2
NetD2_2: D2.2 R2.2 | length 3.5
  Top Layer w0.3: R2.2@13.971,40.7 R2.2
  Top Layer w0.4: D2.2 R2.2@13.971,40.7
NetD3_2: D3.2 R3.2 | length 3.2
  Top Layer w0.3: R3.2@13.845,45.426 R3.2
  Top Layer w0.4: D3.2 R3.2@13.645,45.426 ; R3.2@13.845,45.426 R3.2@14.074,45.426
NetD4_2: D4.2 R4.2 | length 3.5
  Top Layer w0.3: D4.2 D4.2@10.8,49.8
  Top Layer w0.4: D4.2@10.8,49.8 R4.2
NetD5_2: D5.2 R5.2 | length 3.3
  Top Layer w0.3: D5.2 14.365,60.3 R5.2
NetD6_2: D6.2 R6.2 | length 3.4
  Top Layer w0.3: D6.2 R6.2
NetD7_2: D7.2 R7.2 | length 3.5
  Top Layer w0.3: R7.2@14.171,70 R7.2
  Top Layer w0.4: D7.2 R7.2@14.171,70
NetD8_2: D8.2 R8.2 | length 3.6
  Top Layer w0.4: D8.2 R8.2
POC_CONTROL: "Header extr.12" siwa3.4 | length 37.5
  Top Layer w0.3: 92.605,38.72 92.612,38.712
  Top Layer w0.4: siwa3.4 92.605,38.72 ; 92.612,38.712 94.7,40.8 94.7,43.4 104.89,53.59 106.881,53.59
"RESET externo": "Header extr.13" "Header extr.15" | length 2.5
  Top Layer w0.4: 109.421,56.13 109.421,58.67
"Reset integrado": "Header extr.16" U1.2 | length 24.3
  Top Layer w0.4: U1.2 86.95,54.95 88.7,53.2 101.411,53.2 106.881,58.67
"RESET SIWA": "Header extr.14" siwa3.6 | length 46.2
  Bottom Layer w0.4: siwa3.6@77.065,33.632 95.332,33.632 98,36.3 98,41.6 102.6,46.2 102.6,53 105.73,56.13 106.881,56.13
"Salida de regulador de 1.8V": "Regulador 1.8V.5" C_BP_.2 C_OUT_.1 P3.5 | length 26.9
  Top Layer w0.5: C_BP_.2@55.766,84.567 56.121,84.213 56.121,81.328 ; C_BP_.2 55.854,84.523 55.854,87.99 C_OUT_.1 55.875,89.375 56.7,90.2 58.7,90.2 60.3,88.6 60.3,84.4 62.7,82 P3.5
"Salida de regulador de 1V": C_IN3.1 P3.3 U6.5 | length 35.6
  Top Layer w0.5: U6.5 49.295,82.805 47.65,84.45 47.65,89.95 49.5,91.8 59.3,91.8 61.7,89.4 61.7,85.7 62.86,84.54 P3.3
"Salida de regulador de 3V": "Regulador 3V.5" C_BP.2 C_OUT.1 P3.1 | length 41.1
  Top Layer w0.5: C_OUT.1@41.7,88.012 41.7,91.7 43.5,93.5 59.5,93.5 63.6,89.4 63.6,88.3 64.82,87.08 P3.1 ; C_OUT.1 41.772,87.94 41.772,84.472 C_BP.2 41.944,84.156 41.944,81.406
"Salida del interruptor": SW1.1 U1.3 | length 3.5
  Top Layer w0.25: SW1.1@92.759,56.35 SW1.1
  Top Layer w0.4: U1.3 SW1.1@92.759,56.35
"Salida oscilador": "Crystal Oscillator.3" U3.3 | length 3.8
  Top Layer w0.25: 94.225,74.43 94.251,74.404
  Top Layer w0.4: U3.3 94.251,74.404
SCLK: "Header extr.2" j1.6 siwa4.6 | length 85.1
  Top Layer w0.4: siwa4.6@68.8,25.4 68.8,15.2 74.1,9.9 94,9.9 95.33,11.23 j1.6 99.32,9.6 104.7,9.6 106.881,11.781 106.881,40.89
"SCS SPI Chip Select": "Header extr.4" j1.1 siwa3.8 | length 54.3
  Top Layer w0.4: siwa3.8 96.54,28.56 100.4,24.7 j1.1@100.4,21.22 ; j1.1 102.11,21.21 104,23.1 104,40.549 106.881,43.43
UART_RX: "Header extr.1" siwa4.4 | length 91.8
  Top Layer w0.4: siwa4.4 63.73,12.57 68.7,7.6 105.9,7.6 109.421,11.121 109.421,40.89
UART_TX: "Header extr.3" siwa4.2 | length 106.2
  Top Layer w0.4: siwa4.2 58.65,11.05 64.5,5.2 106.7,5.2 111.9,10.4 111.9,40.951 109.421,43.43
pads on no net: SW1.2 SW1.3

## Polygon pours and split planes (outlines as drawn)
GND on Top Layer "NONET_L02_P-001" (solid, pour order 151): 0,0 0,101.6 120,101.6 120,0
"Alimentación 1.8V" on Top Layer "ALIMENTACIóN_1.8V_L01_P058" (solid, pour order 58): 82.4,44.7 82.4,42.9 65.2,42.9 63.5,41.2 63.5,45.8 63.6,46.2 65.3,44.7 65.9,44.7
"Alimentación 1V" on Top Layer "ALIMENTACIóN_1V_L01_P115" (solid, pour order 115): 77.05,32 81.15,32 81.15,30.4 77.05,30.4
"Alimentación 3V" on Top Layer "NONET_L02_P-001" (solid, pour order 142): 89.9,60.6 88.4,60.6 88.4,81.6 89.9,81.6 89.9,70.615 90.555,70 90.861,70 91.535,70 91.535,69.3 90.669,69.3 89.9,68.359
"Alimentación 3V" on Top Layer "ALIMENTACIóN_3V_L01_P122" (solid, pour order 122): 18.8,25.766 13.166,25.766 11.3,23.9 11.3,14.7 12.9,14.7 13,14.8 12.8,15 12.8,23.4 13.8,24.4 18.8,24.4
"Alimentación 1.8V" on Top Layer "ALIMENTACIóN_1.8V_L01_P042" (solid, pour order 42): 80.9,24.495 80.9,23.15 93.55,23.15 94.4,22.3 94.4,20.6 96.4,20.6 96.4,20.7 96.4,22.3 94.205,24.495
"Alimentación 1V" on Top Layer "ALIMENTACIóN_1V_L01_P120" (solid, pour order 120): 51.899,45.081 53.499,43.481 53.299,43.281 53.299,41.2 47.193,41.2 46.099,42.537 46.099,45.081
"Alimentación 1V" on Top Layer "ALIMENTACIóN_1V_L01_P107" (solid, pour order 107): 60.246,26.258 62.1,26.258 62.1,21.058 60.446,21.058 60.246,21.058
"Alimentación 1.8V" on Top Layer "ALIMENTACIóN_1.8V_L01_P030" (solid, pour order 30): 75.9,22.1 75,22.1 74.42,21.52 74.415,21.52 74.415,20.826 74.84,20.4 75.9,20.4
"Alimentación 3V" on Top Layer "ALIMENTACIóN_3V_L01_P033" (solid, pour order 33): 88.4,80.7 88.4,81.8 88.9,82.3 89.4,82.3 89.9,81.8 89.9,80.7
"Alimentación 3V" on Top Layer "ALIMENTACIóN_3V_L01_P034" (solid, pour order 34): 19.6,81.2 17.9,81.2 17.6,80.9 17.6,80.5 17.9,80.2 19.6,80.2
"Alimentación 3V" on Top Layer "ALIMENTACIóN_3V_L01_P039" (solid, pour order 39): 24.303,80.202 22.673,80.202 23.976,81.505 23.976,81.51 25.609,81.51
"Alimentación 3V" on Top Layer "ALIMENTACIóN_3V_L01_P040" (solid, pour order 40): 24.5,80.174 17.9,80.22 17.9,81.209 24.5,81.268
"Alimentación 3V" on Top Layer "ALIMENTACIóN_3V_L01_P041" (solid, pour order 41): 40.2,96.1 38.311,96.1 23.723,81.252 25.4,81.3
"Alimentación 1.8V" on Top Layer "ALIMENTACIóN_1.8V_L01_P043" (solid, pour order 43): 67.065,18.2 67.065,26.635 63.9,29.8 63.9,35.8 62.3,35.8 62.3,29.2 65.6,25.9 65.533,18.2
"Alimentación 1.8V" on Top Layer "ALIMENTACIóN_1.8V_L01_P047" (solid, pour order 47): 62.5,54.6 63.9,54.6 63.9,35.8 62.5,35.8
"Alimentación 1.8V" on Top Layer "ALIMENTACIóN_1.8V_L01_P103" (solid, pour order 103): 52.842,37 60.5,37 63.05,39.55 63.05,33.4 60.5,35.5 52.942,35.5
"Alimentación 1.8V" on Top Layer "ALIMENTACIóN_1.8V_L01_P116" (solid, pour order 116): 53.043,37 47.143,37 47.143,35.6 52.943,35.6 53.043,35.7
"Alimentación 1V" on Top Layer "ALIMENTACIóN_1V_L01_P121" (solid, pour order 121): 66,54 66,51.9 68.427,49.473 71.106,49.473 71.9,50.267 71.9,54
"Alimentación 1V" on Top Layer "NONET_L02_P-001" (solid, pour order 126): 51.7,45.1 51.6,45 51.6,41.1 53.9,41.1 53.9,45 53.8,45.1 51.6,45.1
"Alimentación 1.8V" on Top Layer "NONET_L02_P-001" (solid, pour order 127): 81.7,24.5 81.695,24.495 78.295,24.495 75.9,22.1 75,22.1 75,20.4 76.1,20.4 78.9,23.15 81.75,23.15 81.8,23.2
"Alimentación 1.8V" on Top Layer "NONET_L02_P-001" (solid, pour order 131): 58.3,43.5 61.6,43.5 62.7,42.4 62.8,42.5 62.8,46.6 61.4,45.2 58.3,45.2
"Alimentación 1.8V" on Top Layer "NONET_L02_P-001" (solid, pour order 132): 59.2,43.5 58.2,43.5 50.3,51.4 46.1,51.4 46.1,53.4 50.1,53.4 58.3,45.2 59.4,45.2
"Alimentación 1.8V" on Top Layer "NONET_L02_P-001" (solid, pour order 135): 107.817,82.3 97,82.3 94.4,84.9 84.2,84.9 79.5,80.2 70.2,80.2 70.1,80.1 70.1,78.9 80.4,78.9 85,83.5 93.4,83.5 96.1,80.8 107.794,80.8
"Alimentación 1V" on Top Layer "NONET_L02_P-001" (solid, pour order 136): 71.72,82.7 69.8,82.7 69.8,81.2 69.9,81.1 70,81.2 78.4,81.2 83,85.8 107.5,85.8 107.5,87.5 82.1,87.5 77.3,82.7
"Alimentación 3V" on Top Layer "NONET_L02_P-001" (solid, pour order 139): 80.1,88.4 75.5,83.8 70.5,83.8 70.5,85.3 74.95,85.3 76.8,87.15 76.8,93.4 75.6,94.6 38.713,94.6 38.713,96.1 76.15,96.1 77.9,94.35 77.9,91.9 80,89.8 107.5,89.8 107.5,88.4
"Alimentación 1V" on Bottom Layer "NONET_L02_P-001" (solid, pour order 129): 75.357,81.7 76.643,81.7 76.643,53.557 77.746,52.454 77.77,49.97 72.343,44.543 72.343,32.957 73.4,31.9 77.943,31.9 77.943,30.4 72.743,30.4 70.743,32.399 70.743,32.601 70.743,39.357 69.6,40.5 63,40.5 62.143,39.643 62.143,25 60.443,25 60.443,39.657 59.6,40.5 52.343,40.5 52.343,42.2 69.6,42.2 70.743,43.343 70.743,44.801 76.243,50.3 76.243,51.5 75.143,52.4 68.143,52.4 68.143,53.6 74.143,53.6 75.371,54.829 75.371,81.686
GND on Bottom Layer "NONET_L02_P-001" (solid, pour order 152): 0,0 0,101.6 120,101.6 120,0
"Alimentación 1.8V" on Bottom Layer "NONET_L02_P-001" (solid, pour order 146): 46.1,51.4 46.1,54.05 48.55,56.5 48.6,56.5 49.8,55.3 48.249,53.749 48.249,51.4
"Alimentación 1.8V" on Bottom Layer "NONET_L02_P-001" (solid, pour order 140): 69.882,78.5 69.8,78.418 69.8,70.5 68.4,69.1 61.1,69.1 61.1,69.05 48,55.95 48,53.5 61.9,67.4 69.7,67.4 71.6,69.3 71.6,80.2 69.9,80.2
"Alimentación 3V" on Bottom Layer "ALIMENTACIóN_3V_L02_P036" (solid, pour order 36): 17.319,25.603 17.322,25.6 19.1,25.6 19.1,24.4 18.6,23.9 17.814,23.9 17.314,24.4 17.314,25.6 17.316,25.601
"Alimentación 3V" on Bottom Layer "ALIMENTACIóN_3V_L02_P101" (solid, pour order 101): 17.3,80.4 19.1,80.4 19.1,81.2 18.7,81.6 17.698,81.6 17.298,81.2
"Alimentación 3V" on Bottom Layer "ALIMENTACIóN_3V_L02_P125" (solid, pour order 125): 88.4,89.852 88.4,80.3 89.9,80.3 89.9,89.852
"Alimentación 3V" on Bottom Layer "NONET_L02_P-001" (solid, pour order 123): 17.298,81.2 17.314,24.4 19.1,24.4 19.1,81.2
"Alimentación 1.8V" on Bottom Layer "ALIMENTACIóN_1.8V_L02_P124" (solid, pour order 124): 65.6,22.1 75.9,22.1 75.9,20.4 65.6,20.4

## Silkscreen, mask and mechanical layers (free items; w line width, h text height)
Top Overlay:
  drawing of 29 lines, arcs and shapes, not listed
  text "Amanda Hernandez" at 7.5,90.5 h1.3
  text "Gabriel Perez" at 7.5,87.3 h1.3
  text "Francisco Coto" at 7.5,84 h1.3